# Altium PCB redox_rev1.PcbDoc
Units mm, origin at the board's own origin, x right, y up, seen from the top; angles counter-clockwise.
Board outline 162.18 x 126.49 mm, 2 copper layers (F.Cu, B.Cu); 86 components, 57 nets, 643 pads, 7 vias.
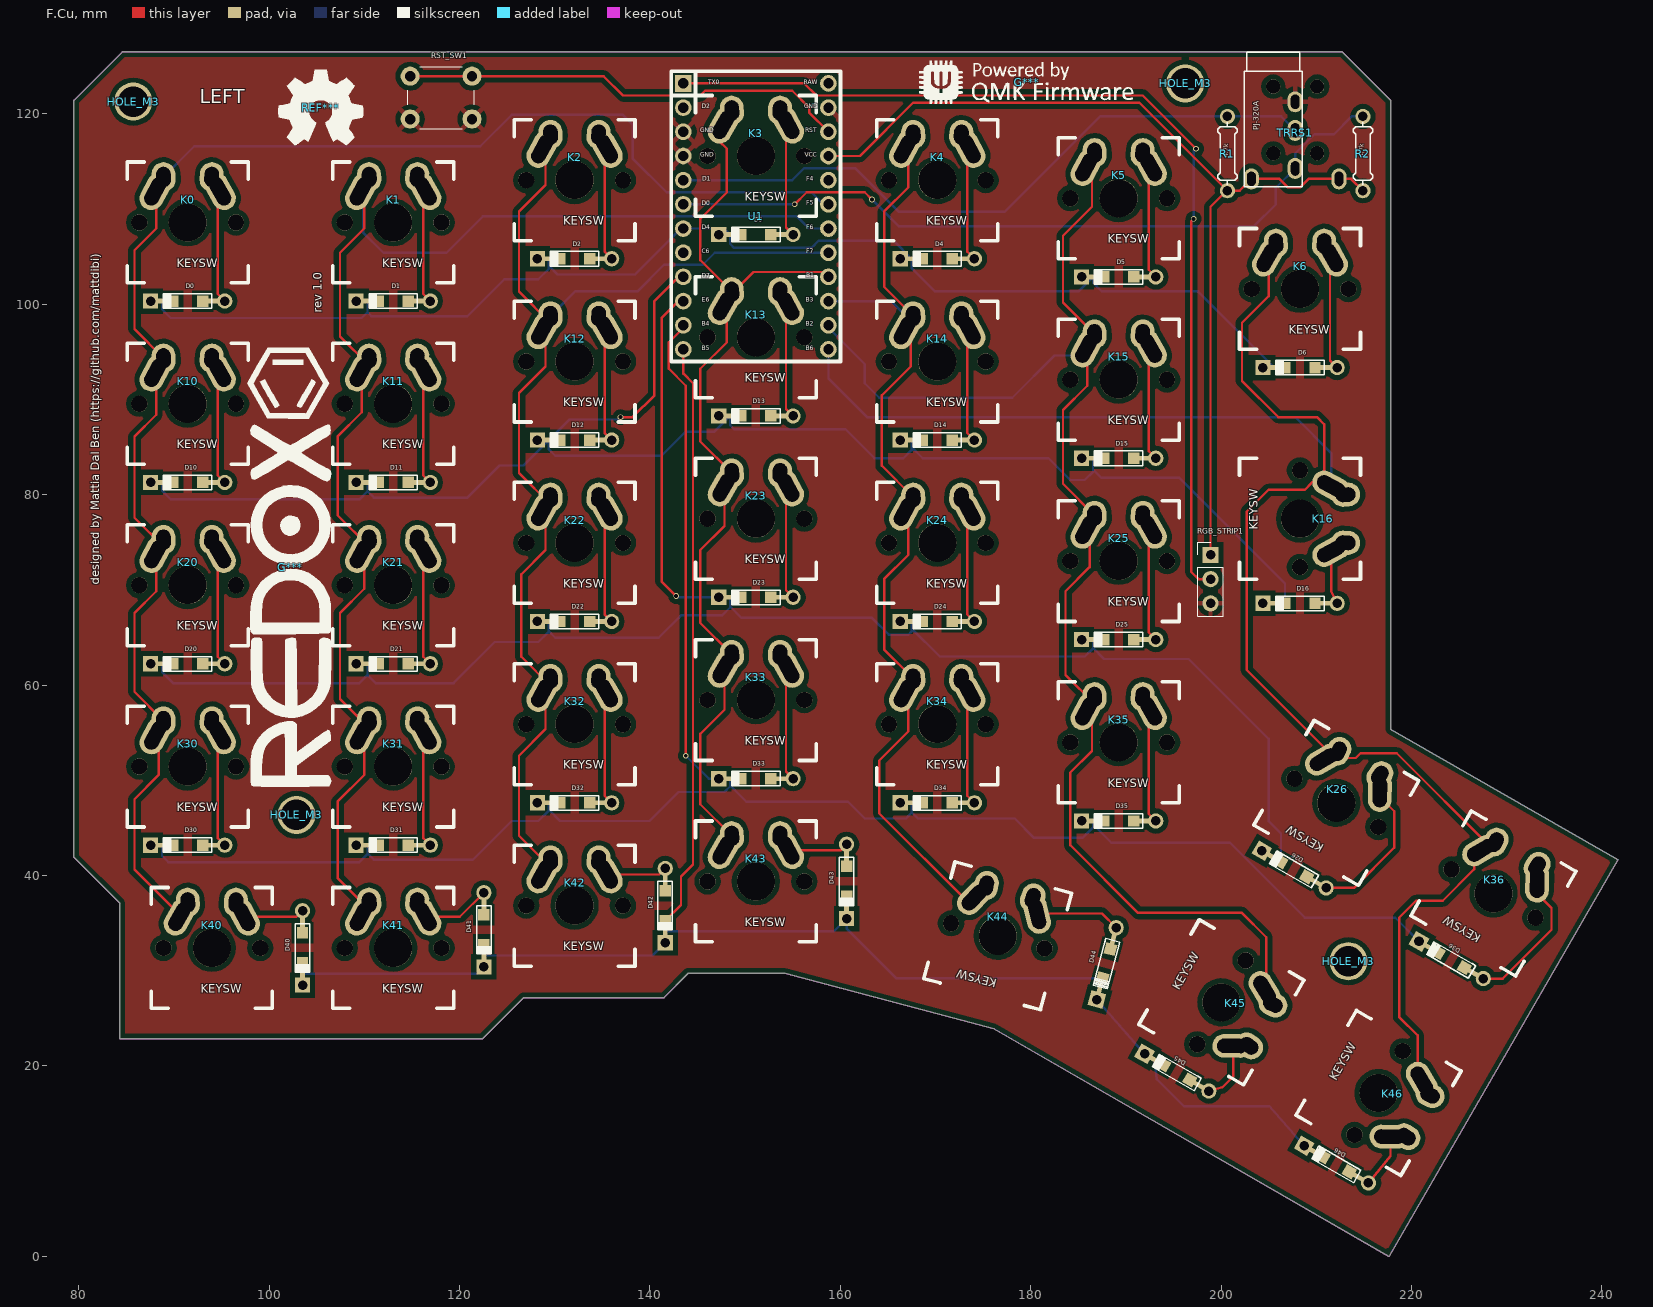
[diagram p0: F.Cu view]
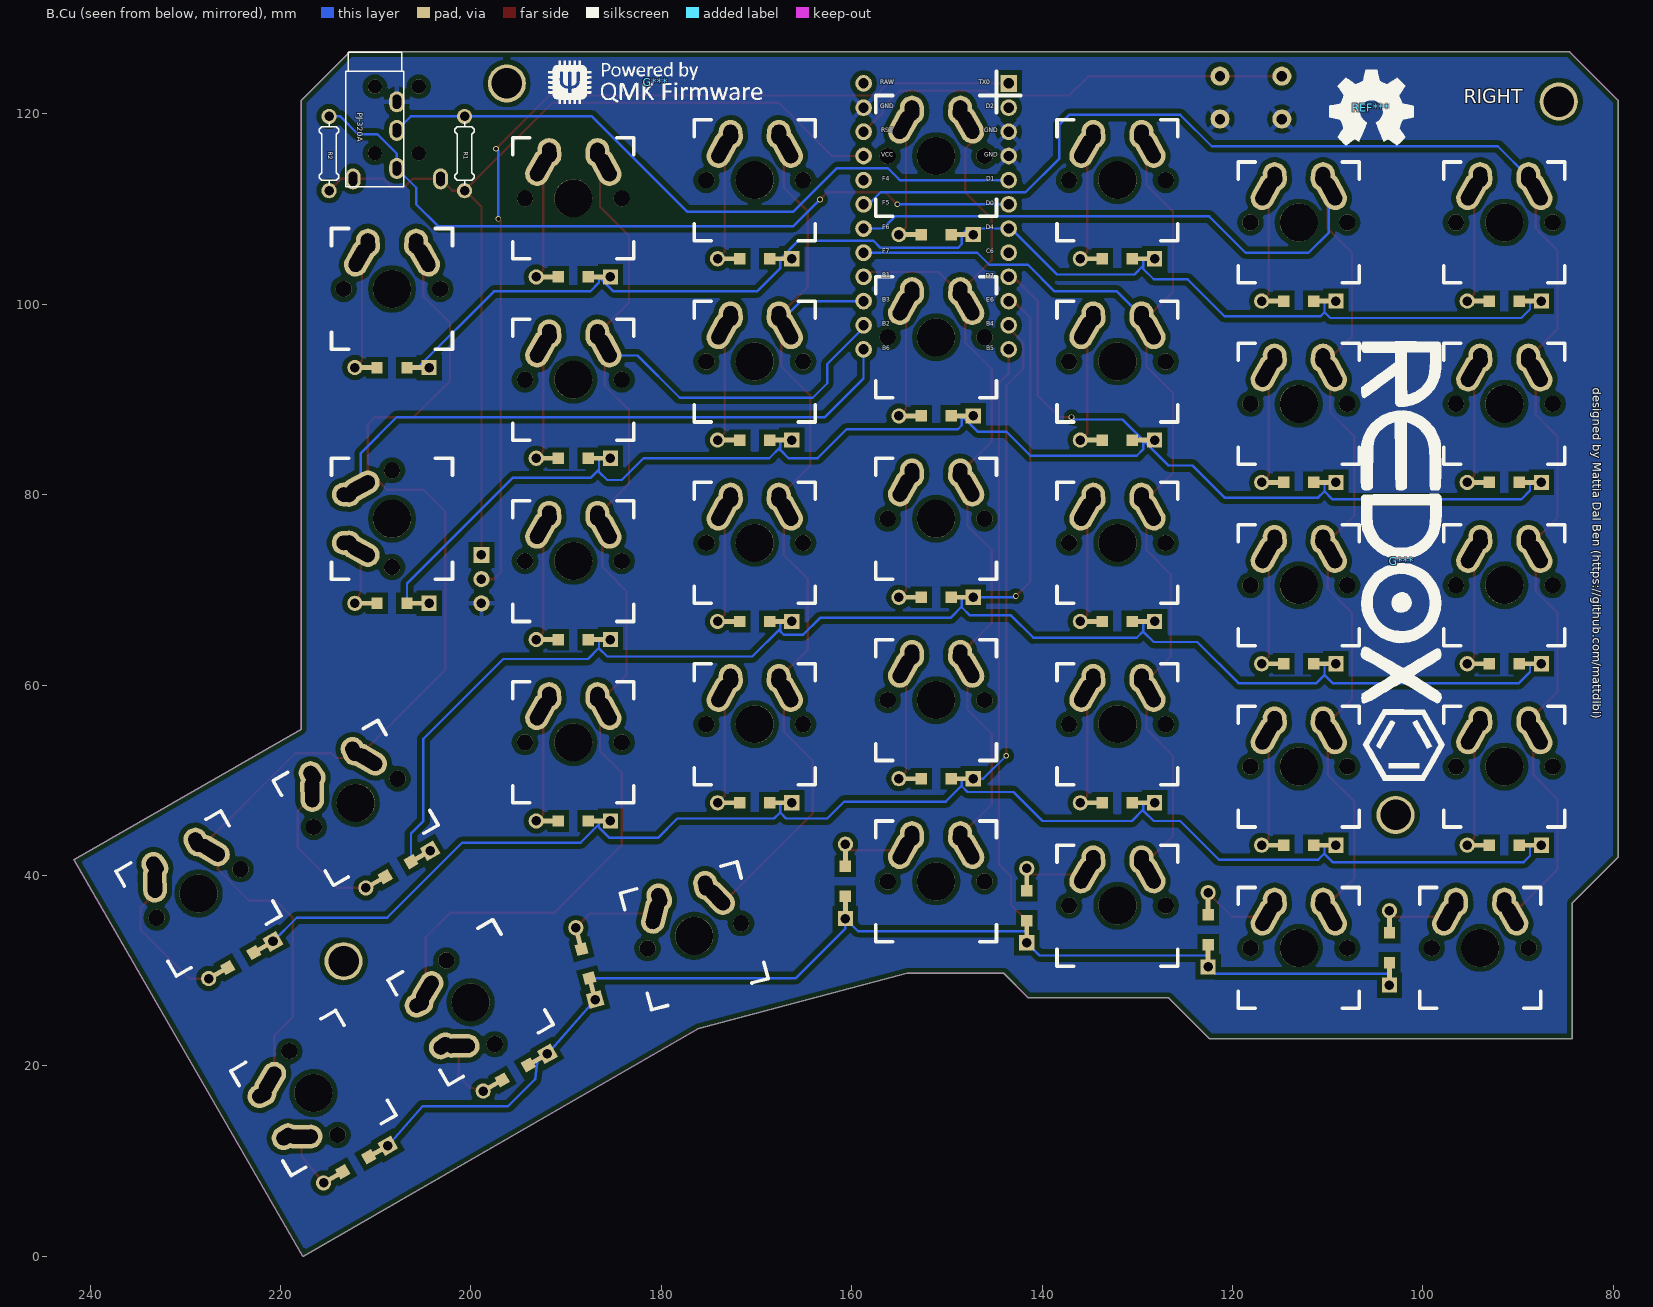
[diagram p1: B.Cu view, seen from below]

## Layer stack, top to bottom
F.Mask: solder mask 0.0102, Solder Resist, Dk 3.5
F.Cu: signal copper 0.0356
Dielectric 1: dielectric 0.32, FR-4, Dk 4.8
B.Cu: signal copper 0.0356
B.Mask: solder mask 0.0102, Solder Resist, Dk 3.5

## Board outline
79.502,118.11 79.502,121.412 84.582,126.492 212.725,126.492 217.805,121.412 217.805,111.252 217.805,55.372 241.681,41.656 217.678,0 217.551,0 176.149,23.876 154.178,29.718 144.018,29.718 141.478,27.178 126.746,27.178 122.428,22.86 84.328,22.86 84.328,37.084 79.502,41.91 79.502,118.11

## Design rules (kind name [scope] priority, off if disabled: settings)
Clearance "Clearence 0.508_Polygon" [InNamedPolygon('F.Cu-GND') OR InNamedPolygon('B.Cu-GND')] p1: gap=0.508 ignorepadtopadclearanceinfootprint=FALSE
Clearance "Clearence 0.2_NetClass" [InNetClass('Default')] p2: gap=0.2 ignorepadtopadclearanceinfootprint=FALSE
HoleSize "Hole Size (Default)" [All] p1: absolutevalues=TRUE maxlimit=10 minlimit=0.3 maxpercent=80.000 minpercent=20.000
MinimumSolderMaskSliver [All] p1: minsoldermaskwidth=0
PolygonConnect Polygon_B.Cu-GND_ConnectDirect [IsNamedPolygon('B.Cu-GND') vs IsVia] p1: connectstyle=Direct reliefconductorwidth=0.254 reliefentries=4 polygonreliefangle="90 Angle" airgapwidth=0.254
PolygonConnect Polygon_B.Cu-GND_ConnectRelief45 [IsNamedPolygon('B.Cu-GND') vs (IsThruPin or IsSMTPin) and (PadShape_AllLayers = 'Round')] p2: connectstyle=Relief reliefconductorwidth=0.508 reliefentries=4 polygonreliefangle="45 Angle" airgapwidth=0.508
PolygonConnect Polygon_B.Cu-GND_ConnectRelief90 [IsNamedPolygon('B.Cu-GND') vs (IsThruPin or IsSMTPin) and (PadShape_AllLayers <> 'Round')] p3: connectstyle=Relief reliefconductorwidth=0.508 reliefentries=4 polygonreliefangle="90 Angle" airgapwidth=0.508
PolygonConnect Polygon_F.Cu-GND_ConnectDirect [IsNamedPolygon('F.Cu-GND') vs IsVia] p4: connectstyle=Direct reliefconductorwidth=0.254 reliefentries=4 polygonreliefangle="90 Angle" airgapwidth=0.254
PolygonConnect Polygon_F.Cu-GND_ConnectRelief45 [IsNamedPolygon('F.Cu-GND') vs (IsThruPin or IsSMTPin) and (PadShape_AllLayers = 'Round')] p5: connectstyle=Relief reliefconductorwidth=0.508 reliefentries=4 polygonreliefangle="45 Angle" airgapwidth=0.508
PolygonConnect Polygon_F.Cu-GND_ConnectRelief90 [IsNamedPolygon('F.Cu-GND') vs (IsThruPin or IsSMTPin) and (PadShape_AllLayers <> 'Round')] p6: connectstyle=Relief reliefconductorwidth=0.508 reliefentries=4 polygonreliefangle="90 Angle" airgapwidth=0.508
RoutingVias [All] p1: holewidth=0.711 width=1.27 viastyle="Through Hole" minholewidth=0.711 minwidth=1.27 maxholewidth=0.711 maxwidth=1.27
SilkToSilkClearance [All] p1: silktosilkclearance=0
SilkToSolderMaskClearance [IsPad] p1: minsilkscreentomaskgap=0 clearancetoexposedcopper=TRUE
SolderMaskExpansion [All] p1: expansion=0.102 istentingtop=FALSE
Width [All] p1: maxlimit=10 minlimit=0.2 preferedwidth=0.25 minimp=50.000000 maximp=50.000000 favimp=50.000000
26 further rules are at their usual default settings.

## Classes and differential pairs
net class Default: col0 col1 col2 col3 col4 col5 col6 GND Net-(D0-Pad2) Net-(D1-Pad2) Net-(D2-Pad2) Net-(D3-Pad2) Net-(D4-Pad2) Net-(D5-Pad2) Net-(D6-Pad2) Net-(D10-Pad2) Net-(D11-Pad2) Net-(D12-Pad2) Net-(D13-Pad2) Net-(D14-Pad2) Net-(D15-Pad2) Net-(D16-Pad2) Net-(D20-Pad2) Net-(D21-Pad2) Net-(D22-Pad2) Net-(D23-Pad2) Net-(D24-Pad2) Net-(D25-Pad2) Net-(D26-Pad2) Net-(D30-Pad2) Net-(D31-Pad2) Net-(D32-Pad2) Net-(D33-Pad2) Net-(D34-Pad2) Net-(D35-Pad2) Net-(D36-Pad2) Net-(D40-Pad2) Net-(D41-Pad2) Net-(D42-Pad2) Net-(D43-Pad2) Net-(D44-Pad2) Net-(D45-Pad2) Net-(D46-Pad2) Net-(U1-Pad2) Net-(U1-Pad8) Net-(U1-Pad20) Net-(U1-Pad24) rgb_data row0 row1 row2 row3 row4 RST SCL SDA VCC

## Components (designator, comment, footprint, x,y, rotation, side; value= is the part's Value field where it differs from the comment)
D0 "D" Diode-dual 91.44,100.33 r180 top
D1 "D" Diode-dual 113.03,100.33 r180 top
D2 "D" Diode-dual 132.08,104.775 r180 top
D3 "D" Diode-dual 151.13,107.315 r180 top
D4 "D" Diode-dual 170.18,104.775 r180 top
D5 "D" Diode-dual 189.23,102.87 r180 top
D6 "D" Diode-dual 208.28,93.345 r180 top
D10 "D" Diode-dual 91.44,81.28 r180 top
D11 "D" Diode-dual 113.03,81.28 r180 top
D12 "D" Diode-dual 132.08,85.725 r180 top
D13 "D" Diode-dual 151.13,88.265 r180 top
D14 "D" Diode-dual 170.18,85.725 r180 top
D15 "D" Diode-dual 189.23,83.82 r180 top
D16 "D" Diode-dual 208.28,68.58 r180 top
D20 "D" Diode-dual 91.44,62.23 r180 top
D21 "D" Diode-dual 113.03,62.23 r180 top
D22 "D" Diode-dual 132.08,66.675 r180 top
D23 "D" Diode-dual 151.13,69.215 r180 top
D24 "D" Diode-dual 170.18,66.675 r180 top
D25 "D" Diode-dual 189.23,64.77 r180 top
D26 "D" Diode-dual 207.645,40.64 r150 top
D30 "D" Diode-dual 91.44,43.18 r180 top
D31 "D" Diode-dual 113.03,43.18 r180 top
D32 "D" Diode-dual 132.08,47.625 r180 top
D33 "D" Diode-dual 151.13,50.165 r180 top
D34 "D" Diode-dual 170.18,47.625 r180 top
D35 "D" Diode-dual 189.23,45.72 r180 top
D36 "D" Diode-dual 224.155,31.115 r150 top
D40 "D" Diode-dual 103.505,32.385 r270 top
D41 "D" Diode-dual 122.555,34.29 r270 top
D42 "D" Diode-dual 141.605,36.83 r270 top
D43 "D" Diode-dual 160.655,39.37 r270 top
D44 "D" Diode-dual 187.96,30.734 r255 top
D45 "D" Diode-dual 195.326,19.304 r150 top
D46 "D" Diode-dual 212.09,9.652 r150 top
G*** "LOGO" qmk-badge 180.594,123.317 r0 bottom
G*** "LOGO" qmk-badge 179.578,123.317 r0 top
G*** "LOGO" redox-logo 102.235,73.025 r90 bottom
G*** "LOGO" redox-logo 102.235,72.39 r90 top
HOLE_M3 "VAL**" HOLE_M3 196.215,123.19 r0 top
HOLE_M3 "VAL**" HOLE_M3 102.87,46.355 r0 top
HOLE_M3 "VAL**" HOLE_M3 85.725,121.285 r0 top
HOLE_M3 "VAL**" HOLE_M3 213.36,30.988 r0 top
K0 "KEYSW" Mx_Alps_125-dualside 91.44,108.585 r0 top
K1 "KEYSW" Mx_Alps_100-dualside 113.03,108.585 r0 top
K2 "KEYSW" Mx_Alps_100-dualside 132.08,113.03 r0 top
K3 "KEYSW" Mx_Alps_100-dualside 151.13,115.57 r0 top
K4 "KEYSW" Mx_Alps_100-dualside 170.18,113.03 r0 top
K5 "KEYSW" Mx_Alps_100-dualside 189.23,111.125 r0 top
K6 "KEYSW" Mx_Alps_100-dualside 208.28,101.6 r0 top
K10 "KEYSW" Mx_Alps_125-dualside 91.44,89.535 r0 top
K11 "KEYSW" Mx_Alps_100-dualside 113.03,89.535 r0 top
K12 "KEYSW" Mx_Alps_100-dualside 132.08,93.98 r0 top
K13 "KEYSW" Mx_Alps_100-dualside 151.13,96.52 r0 top
K14 "KEYSW" Mx_Alps_100-dualside 170.18,93.98 r0 top
K15 "KEYSW" Mx_Alps_100-dualside 189.23,92.075 r0 top
K16 "KEYSW" Mx_Alps_150-dualsided 208.28,77.47 r270 top
K20 "KEYSW" Mx_Alps_125-dualside 91.44,70.485 r0 top
K21 "KEYSW" Mx_Alps_100-dualside 113.03,70.485 r0 top
K22 "KEYSW" Mx_Alps_100-dualside 132.08,74.93 r0 top
K23 "KEYSW" Mx_Alps_100-dualside 151.13,77.47 r0 top
K24 "KEYSW" Mx_Alps_100-dualside 170.18,74.93 r0 top
K25 "KEYSW" Mx_Alps_100-dualside 189.23,73.025 r0 top
K26 "KEYSW" Mx_Alps_100-dualside 212.09,47.625 r330 top
K30 "KEYSW" Mx_Alps_125-dualside 91.44,51.435 r0 top
K31 "KEYSW" Mx_Alps_100-dualside 113.03,51.435 r0 top
K32 "KEYSW" Mx_Alps_100-dualside 132.08,55.88 r0 top
K33 "KEYSW" Mx_Alps_100-dualside 151.13,58.42 r0 top
K34 "KEYSW" Mx_Alps_100-dualside 170.18,55.88 r0 top
K35 "KEYSW" Mx_Alps_100-dualside 189.23,53.975 r0 top
K36 "KEYSW" Mx_Alps_100-dualside 228.6,38.1 r330 top
K40 "KEYSW" Mx_Alps_100-dualside 93.98,32.385 r0 top
K41 "KEYSW" Mx_Alps_100-dualside 113.03,32.385 r0 top
K42 "KEYSW" Mx_Alps_100-dualside 132.08,36.83 r0 top
K43 "KEYSW" Mx_Alps_100-dualside 151.13,39.37 r0 top
K44 "KEYSW" Mx_Alps_125-dualside 176.53,33.655 r345 top
K45 "KEYSW" Mx_Alps_150-dualsided 200.025,26.67 r240 top
K46 "KEYSW" Mx_Alps_150-dualsided 216.535,17.145 r240 top
R1 "4.7k" Resistor-Compact 200.66,115.824 r90 top
R2 "4.7k" Resistor-Compact 214.884,115.824 r90 top
REF*** "OSHW-Logo2_14.6x12mm_SilkScreen" OSHW-Symbol_8.9x8mm_SilkScreen 105.41,120.65 r0 bottom
REF*** "OSHW-Logo2_14.6x12mm_SilkScreen" OSHW-Symbol_8.9x8mm_SilkScreen 105.41,120.65 r0 top
RGB_STRIP1 "Conn_01x03" Pin_Header_Straight_1x03_Pitch2.54mm 198.882,73.66 r0 top
RST_SW1 "SW_PUSH" SW_PUSH_6mm_h4.3mm 114.808,123.952 r0 top
TRRS1 "Audio-Jack-4" TRRS-PJ-320A-dual 207.772,124.46 r0 top
U1 "ProMicro" ArduinoProMicro 151.13,109.22 r270 top

## Footprints (in the part's own frame and the unit in brackets; to place one, negate y for a bottom-side part, rotate by r counter-clockwise, add the part's x,y. Pads: shape width x height; smd on the part's side, far side on the other; paste and mask are expansions set on the pad)
ArduinoProMicro [mil]
  rect 69x69 hole 43 paste-69 mask+0: 1(-550,-300)
  round 69 hole 43 paste-69 mask+0: 2(-450,-300) 3(-350,-300) 4(-250,-300) 5(-150,-300) 6(-50,-300) 7(50,-300) 8(150,-300) 9(250,-300) 10(350,-300) 11(450,-300) 12(550,-300) 13(550,300) 14(450,300) 15(350,300) 16(250,300) 17(150,300) 18(50,300) 19(-50,300) 20(-150,300) 21(-250,300) 22(-350,300) 23(-450,300) 24(-550,300)
  silkscreen extent -600,-350 600,350
Diode-dual [mm]
  rect 1.2x1.2 smd far side mask+0: 1(1.575,0) 2(-1.575,0)
  rect 1.2x1.2 smd mask+0: 1(1.575,0) 2(-1.575,0)
  rect 2.5x0.5 smd far side paste-2.5 mask-2.5: 1(2.7,0) 2(-2.7,0)
  rect 2.5x0.5 smd paste-2.5 mask-2.5: 1(2.7,0) 2(-2.7,0)
  rect 1.6x1.6 hole 1 paste-1.6 mask+0: 1(3.9,0)
  round 1.6 hole 1 paste-1.6 mask+0: 2(-3.9,0)
  silkscreen extent -2.54,-0.76 2.54,0.76
HOLE_M3 [mm]
  round 4 hole 3.2 paste-4 mask+0: 1(0,0)
Mx_Alps_100-dualside [mm]
  rrect100% 2.5x4.17 hole 3.17 slot 1.5 at 150.95 deg rot 150.95 paste-4.17 mask+0: 1(-3.405,3.27)
  rrect100% 2.5x3.08 hole 2.08 slot 1.5 at 3.9 deg rot 3.9 paste-3.08 mask+0: 1(-2.52,4.79)
  rrect100% 2.5x3.08 hole 2.08 slot 1.5 at 176.1 deg rot 176.1 paste-3.08 mask+0: 2(2.52,4.79)
  rrect100% 2.5x4.17 hole 3.17 slot 1.5 at 29.05 deg rot 29.05 paste-4.17 mask+0: 2(3.405,3.27)
  round 1.702 hole 1.702 paste-1.702 mask-1.702: HOLE(-5.08,0) HOLE(5.08,0)
  round 3.988 hole 3.988 paste-3.988 mask-3.988: HOLE(0,0)
  silkscreen extent -6.35,-6.35 6.35,6.35
Mx_Alps_125-dualside [mm]
  rrect100% 2.5x4.17 hole 3.17 slot 1.5 at 150.95 deg rot 150.95 paste-4.17 mask+0: 1(-3.405,3.27)
  rrect100% 2.5x3.08 hole 2.08 slot 1.5 at 3.9 deg rot 3.9 paste-3.08 mask+0: 1(-2.52,4.79)
  rrect100% 2.5x3.08 hole 2.08 slot 1.5 at 176.1 deg rot 176.1 paste-3.08 mask+0: 2(2.52,4.79)
  rrect100% 2.5x4.17 hole 3.17 slot 1.5 at 29.05 deg rot 29.05 paste-4.17 mask+0: 2(3.405,3.27)
  round 1.702 hole 1.702 paste-1.702 mask-1.702: HOLE(-5.08,0) HOLE(5.08,0)
  round 3.988 hole 3.988 paste-3.988 mask-3.988: HOLE(0,0)
  silkscreen extent -6.35,-6.35 6.35,6.35
Mx_Alps_150-dualsided [mm]
  rrect100% 2.5x4.17 hole 3.17 slot 1.5 at 150.95 deg rot 150.95 paste-4.17 mask+0: 1(-3.405,3.27)
  rrect100% 2.5x3.08 hole 2.08 slot 1.5 at 3.9 deg rot 3.9 paste-3.08 mask+0: 1(-2.52,4.79)
  rrect100% 2.5x3.08 hole 2.08 slot 1.5 at 176.1 deg rot 176.1 paste-3.08 mask+0: 2(2.52,4.79)
  rrect100% 2.5x4.17 hole 3.17 slot 1.5 at 29.05 deg rot 29.05 paste-4.17 mask+0: 2(3.405,3.27)
  round 1.702 hole 1.702 paste-1.702 mask-1.702: HOLE(-5.08,0) HOLE(5.08,0)
  round 3.988 hole 3.988 paste-3.988 mask-3.988: HOLE(0,0)
  silkscreen extent -6.35,-6.35 6.35,6.35
OSHW-Symbol_8.9x8mm_SilkScreen [mm]
  silkscreen extent -4.46,-4 4.44,3.96
Pin_Header_Straight_1x03_Pitch2.54mm [mm]
  rect 1.7x1.7 hole 1 paste-1.7 mask+0: 1(0,0)
  rrect100% 1.7x1.7 hole 1 paste-1.7 mask+0: 2(0,-2.54) 3(0,-5.08)
  silkscreen extent -1.33,-6.41 1.33,1.33
qmk-badge [mm]
  silkscreen extent -11.19,-2.26 11.29,2.29
redox-logo [mm]
  silkscreen extent -23.06,-4.55 23.06,4.27
Resistor-Compact [mm]
  round 1.6 hole 1 paste-1.6 mask+0: 1(3.9,0) 2(-3.9,0)
  silkscreen extent -3.3,-1.02 3.3,1.02
SW_PUSH_6mm_h4.3mm [mm]
  round 2 hole 1.1 paste-2 mask+0: 1(0,0) 1(6.5,0) 2(0,-4.5) 2(6.5,-4.5)
  silkscreen extent -0.25,-5.5 6.75,1
TRRS-PJ-320A-dual [mm]
  rrect100% 1.6x2.2 hole 1.5 slot 0.9 at 0 deg paste-2.2 mask+0: 1(-4.6,-11.3) 1(4.6,-11.3) 2(0,-10.2) 3(0,-6.2) 4(0,-3.2)
  round 1.5 hole 1.5 paste-1.5 mask+0: Un1(2.3,-8.6) Un2(2.3,-1.6) Un3(-2.3,-8.6) Un4(-2.3,-1.6)
  silkscreen extent -5.35,-12.1 0.75,2

## Part data
D0 D1 D2 D3 D4 D5 D6 D10 D11 D12 D13 D14 D15 D16 D20 D21 D22 D23 D24 D25 D26 D30 D31 D32 D33 D34 D35 D36 D40 D41 D42 D43 D44 D45 D46: library part Diode-dual
G*** G***: library part qmk-badge
G*** G***: library part redox-logo
HOLE_M3 HOLE_M3 HOLE_M3 HOLE_M3: library part HOLE_M3
K0 K10 K20 K30 K44: library part Mx_Alps_125-dualside, "MXALPS"
K1 K2 K3 K4 K5 K6 K11 K12 K13 K14 K15 K21 K22 K23 K24 K25 K26 K31 K32 K33 K34 K35 K36 K40 K41 K42 K43: library part Mx_Alps_100-dualside, "MXALPS"
K16 K45 K46: library part Mx_Alps_150-dualsided, "MXALPS"
R1 R2: library part Resistor-Compact
REF*** REF***: library part OSHW-Symbol_8.9x8mm_SilkScreen, "Open Source Hardware Symbol"
RGB_STRIP1: library part Pin_Header_Straight_1x03_Pitch2.54mm, "Through hole straight pin header, 1x03, 2.54mm pitch, single row"
RST_SW1: library part SW_PUSH_6mm_h4.3mm, "tactile push button, 6x6mm e.g. PHAP33xx series, height=4.3mm"
TRRS1: library part TRRS-PJ-320A-dual
U1: library part ArduinoProMicro

## Via types
v1: diameter 0.6, hole 0.4, F.Cu to B.Cu, tented both sides, 7 vias

## Nets (pads, with @x,y where several pads share a name; then routed paths per layer and width w, separated by ;. In a path a pad name is that pad's centre, name@x,y a point inside that pad or via, vN(x,y) a via of type N, cw(c..) or ccw(c..) an arc to the next point about the centre after c; other vN are vias at no path point)
col0: K0.1 K10.1 K20.1 K30.1 K40.1 U1.19 | length 167.6
  F.Cu w0.25: K0.1@88.94,112.585 88.94,112.51 88.138,111.708 88.138,107.95 85.852,105.664 85.852,97.393 88.92,94.325 88.94,93.535 88.94,93.46 88.138,92.658 88.138,88.392 85.852,86.106 85.852,77.573 88.94,74.485 88.94,74.41 88.138,73.608 88.138,69.85 85.852,67.564 85.852,59.293 88.92,56.225 88.94,55.435 88.94,55.36 88.392,54.812 88.392,50.546 85.852,48.006 85.852,40.628 90.095,36.385 K40.1@91.48,36.385
  B.Cu w0.25: K0.1@88.94,112.585 88.92,113.375 92.131,116.586 122.174,116.586 125.476,119.888 137.16,119.888 138.176,118.872 138.176,115.316 141.732,111.76 156.972,111.76 158.242,110.49 U1.19
col1: K1.1 K11.1 K21.1 K31.1 K41.1 U1.18 | length 144
  F.Cu w0.25: K41.1@110.53,36.385 107.188,39.727 107.188,47.752 109.982,50.546 109.982,54.812 110.53,55.36 110.53,55.435 107.442,58.523 107.442,67.564 109.982,70.104 109.982,73.862 110.53,74.41 110.53,74.485 107.188,77.827 107.188,86.106 109.728,88.646 109.728,92.658 110.53,93.46 110.53,93.535 107.442,96.623 107.442,105.41 109.982,107.95 109.982,111.962 110.53,112.51 K1.1@110.53,112.585
  B.Cu w0.25: K1.1@110.53,112.585 109.875,111.855 109.875,107.549 112.014,105.41 118.618,105.41 122.428,109.22 155.448,109.22 156.718,107.95 U1.18
col2: K2.1 K12.1 K22.1 K32.1 K42.1 U1.17 | length 119.8
  F.Cu w0.25: K42.1@129.58,40.83 126.238,44.172 126.238,52.578 129.032,55.372 129.032,59.257 129.58,59.805 129.58,59.88 126.492,62.968 126.492,71.628 129.032,74.168 129.032,78.307 129.58,78.855 129.58,78.93 126.238,82.272 126.238,90.678 129.032,93.472 129.032,97.357 129.58,97.905 129.58,97.98 126.238,101.322 126.238,109.728 129.032,112.522 129.032,116.407 129.58,116.955 K2.1@129.58,117.03
  B.Cu w0.25: K12.1@129.58,97.98 129.56,98.77 132.136,101.346 138.684,101.346 141.478,104.14 145.542,104.14 146.812,105.41 U1.17
col3: K3.1 K13.1 K23.1 K33.1 K43.1 U1.16 | length 97.1
  F.Cu w0.25: K3.1@147.32,118.11 147.32,117.094 148.082,116.332 148.082,111.76 145.288,108.966 145.288,104.632 148.61,101.31 148.63,101.29 K13.1@148.63,101.132 ; K43.1@148.63,43.37 148.61,44.16 145.288,47.482 145.288,54.864 147.828,57.404 147.828,61.543 148.63,62.345 148.63,62.42 148.61,63.21 145.288,66.532 145.288,74.168 147.828,76.708 147.828,80.593 148.63,81.395 148.63,81.47 148.61,82.26 145.288,85.582 145.288,93.218 148.082,96.012 148.082,99.897 148.63,100.445 148.63,100.52 K13.1@148.63,101.132 ; U1.16 158.242,103.378 150.876,103.378 K13.1@148.63,101.132
col4: K4.1 K14.1 K24.1 K34.1 K44.1 U1.15 | length 103.1
  F.Cu w0.25: K4.1@167.68,117.03 167.68,116.955 167.132,116.407 167.132,112.268 164.592,109.728 164.592,101.838 167.66,98.77 167.68,97.98 167.68,97.905 167.386,97.611 167.386,93.472 164.338,90.424 164.338,83.042 167.66,79.72 167.68,78.93 167.68,78.855 167.132,78.307 167.132,73.66 164.592,71.12 164.592,63.738 167.66,60.67 167.68,59.88 167.68,59.805 167.132,59.257 167.132,55.118 164.084,52.07 164.084,46.518 173.497,37.105 K44.1@173.507,37.095
  B.Cu w0.25: U1.15 165.33,100.33 K14.1@167.68,97.98
col5: K5.1 K15.1 K25.1 K35.1 K45.1 U1.14 | length 145.7
  F.Cu w0.25: K35.1@186.182,57.352 K35.1@186.436,57.606 ; K5.1@186.73,115.125 186.73,115.05 186.436,114.756 186.436,110.236 183.388,107.188 183.388,100.187 186.71,96.865 186.73,96.075 186.73,96 185.928,95.198 185.928,91.44 183.388,88.9 183.388,81.137 186.71,77.815 186.73,77.025 186.73,76.95 186.182,76.402 186.182,72.39 183.642,69.85 183.642,61.063 186.73,57.975 186.73,57.9 K35.1@186.436,57.606 ; K45.1@204.739,26.835 204.739,33.513 202.184,36.068 191.262,36.068 184.15,43.18 184.15,50.8 186.436,53.086 K35.1@186.436,57.606
  B.Cu w0.25: U1.14 158.75,97.536 162.56,93.726 162.56,91.694 164.084,90.17 178.054,90.17 182.499,94.615 K15.1@185.42,94.615
col6: K6.1 K16.1 K26.1 K36.1 K46.1 U1.13 | length 184.3
  F.Cu w0.25: K6.1@205.78,105.6 205.78,105.525 204.978,104.723 204.978,100.838 202.184,98.044 202.184,91.948 205.994,88.138 210.058,88.138 210.82,87.376 210.82,81.28 209.55,81.28 208.788,80.518 204.978,80.518 202.692,78.232 202.692,61.572 211.925,52.339 214.137,52.339 214.63,52.832 218.44,52.832 228.435,42.837 K36.1@228.435,42.814 ; K46.1@220.64,19.175 220.64,23.2 218.694,25.146 218.694,35.56 220.472,37.338 223.266,37.338 226.57,40.642 K36.1@226.57,42.205
  B.Cu w0.25: U1.13 158.75,92.202 162.814,88.138 207.772,88.138 211.55,84.36 211.55,80.875 211.55,80.625 K16.1@212.28,79.97
GND: RGB_STRIP1.3 RST_SW1.2 TRRS1.4 U1.3 U1.4 U1.23
Net-(D0-Pad2): D0.2 K0.2 | length 11.8
  F.Cu w0.25: K0.2@94.595,111.855 94.595,101.075 D0.2@95.34,100.33
Net-(D1-Pad2): D1.2 K1.2 | length 11.8
  F.Cu w0.25: K1.2@116.185,111.855 116.185,101.075 D1.2@116.93,100.33
Net-(D2-Pad2): D2.2 K2.2 | length 11.8
  F.Cu w0.25: K2.2@135.235,116.3 135.235,105.52 D2.2@135.98,104.775
Net-(D3-Pad2): D3.2 K3.2 | length 11.8
  F.Cu w0.25: K3.2@154.285,118.84 154.285,108.06 D3.2@155.03,107.315
Net-(D4-Pad2): D4.2 K4.2 | length 11.8
  F.Cu w0.25: K4.2@173.335,116.3 173.335,105.52 D4.2@174.08,104.775
Net-(D5-Pad2): D5.2 K5.2 | length 11.8
  F.Cu w0.25: K5.2@192.385,114.395 192.385,103.615 D5.2@193.13,102.87
Net-(D6-Pad2): D6.2 K6.2 | length 11.8
  F.Cu w0.25: K6.2@211.435,104.87 211.435,94.09 D6.2@212.18,93.345
Net-(D10-Pad2): D10.2 K10.2 | length 11.8
  F.Cu w0.25: K10.2@94.595,92.805 94.595,82.025 D10.2@95.34,81.28
Net-(D11-Pad2): D11.2 K11.2 | length 11.8
  F.Cu w0.25: K11.2@116.185,92.805 116.185,82.025 D11.2@116.93,81.28
Net-(D12-Pad2): D12.2 K12.2 | length 11.8
  F.Cu w0.25: K12.2@135.235,97.25 135.235,86.47 D12.2@135.98,85.725
Net-(D13-Pad2): D13.2 K13.2 | length 11.8
  F.Cu w0.25: K13.2@154.285,99.79 154.285,89.01 D13.2@155.03,88.265
Net-(D14-Pad2): D14.2 K14.2 | length 11.8
  F.Cu w0.25: K14.2@173.335,97.25 173.335,86.47 D14.2@174.08,85.725
Net-(D15-Pad2): D15.2 K15.2 | length 11.8
  F.Cu w0.25: K15.2@192.385,95.345 192.385,84.565 D15.2@193.13,83.82
Net-(D16-Pad2): D16.2 K16.2 | length 5.9
  F.Cu w0.25: K16.2@211.55,74.315 211.55,74.065 211.55,69.845 211.942,69.059 D16.2@212.18,68.58
Net-(D20-Pad2): D20.2 K20.2 | length 11.8
  F.Cu w0.25: K20.2@94.595,73.755 94.595,62.975 D20.2@95.34,62.23
Net-(D21-Pad2): D21.2 K21.2 | length 11.8
  F.Cu w0.25: K21.2@116.185,73.755 116.185,62.975 D21.2@116.93,62.23
Net-(D22-Pad2): D22.2 K22.2 | length 11.8
  F.Cu w0.25: K22.2@135.235,78.2 135.235,67.42 D22.2@135.98,66.675
Net-(D23-Pad2): D23.2 K23.2 | length 11.8
  F.Cu w0.25: K23.2@154.285,80.74 154.285,69.96 D23.2@155.03,69.215
Net-(D24-Pad2): D24.2 K24.2 | length 11.8
  F.Cu w0.25: K24.2@173.335,78.2 173.335,67.42 D24.2@174.08,66.675
Net-(D25-Pad2): D25.2 K25.2 | length 11.8
  F.Cu w0.25: K25.2@192.385,76.295 192.385,65.515 D25.2@193.13,64.77
Net-(D26-Pad2): D26.2 K26.2 | length 15.6
  F.Cu w0.25: D26.2@211.022,38.69 213.95,38.69 218.186,42.926 218.186,46.736 216.457,48.465 K26.2@216.457,48.879
Net-(D30-Pad2): D30.2 K30.2 | length 11.8
  F.Cu w0.25: K30.2@94.595,54.705 94.595,43.925 D30.2@95.34,43.18
Net-(D31-Pad2): D31.2 K31.2 | length 11.8
  F.Cu w0.25: K31.2@116.185,54.705 116.185,43.925 D31.2@116.93,43.18
Net-(D32-Pad2): D32.2 K32.2 | length 11.8
  F.Cu w0.25: K32.2@135.235,59.15 135.235,48.37 D32.2@135.98,47.625
Net-(D33-Pad2): D33.2 K33.2 | length 11.8
  F.Cu w0.25: K33.2@154.285,61.69 154.285,50.91 D33.2@155.03,50.165
Net-(D34-Pad2): D34.2 K34.2 | length 11.8
  F.Cu w0.25: K34.2@173.335,59.15 173.335,48.37 D34.2@174.08,47.625
Net-(D35-Pad2): D35.2 K35.2 | length 11.8
  F.Cu w0.25: K35.2@192.385,57.245 192.385,46.465 D35.2@193.13,45.72
Net-(D36-Pad2): D36.2 K36.2 | length 15.1
  F.Cu w0.25: D36.2@227.532,29.165 229.571,29.165 234.696,34.29 234.696,36.576 232.967,38.305 K36.2@232.967,39.354
Net-(D40-Pad2): D40.2 K40.2 | length 6.6
  F.Cu w0.25: K40.2@97.135,35.655 97.385,35.655 102.875,35.655 D40.2@103.505,36.285
Net-(D41-Pad2): D41.2 K41.2 | length 7.4
  F.Cu w0.25: K41.2@116.185,35.655 116.435,35.655 120.02,35.655 D41.2@122.555,38.19
Net-(D42-Pad2): D42.2 K42.2 | length 6.6
  F.Cu w0.25: K42.2@135.235,40.1 135.485,40.1 140.975,40.1 D42.2@141.605,40.73
Net-(D43-Pad2): D43.2 K43.2 | length 6.6
  F.Cu w0.25: K43.2@154.285,42.64 154.535,42.64 160.025,42.64 D43.2@160.655,43.27
Net-(D44-Pad2): D44.2 K44.2 | length 9.2
  F.Cu w0.25: K44.2@180.424,35.984 180.424,35.997 187.474,35.997 D44.2@188.969,34.501
Net-(D45-Pad2): D45.2 K45.2 | length 6.5
  F.Cu w0.25: D45.2@198.703,17.354 200.107,17.735 201.279,18.907 K45.2@201.279,22.303
Net-(D46-Pad2): D46.2 K46.2 | length 5.9
  F.Cu w0.25: D46.2@215.467,7.702 217.789,10.532 K46.2@217.789,12.778
Net-(U1-Pad2): U1.2
Net-(U1-Pad8): U1.8
Net-(U1-Pad20): U1.20
Net-(U1-Pad24): U1.24
rgb_data: RGB_STRIP1.2 U1.1 | length 103.7
  F.Cu w0.25: U1.1 156.21,123.19 157.48,121.92 191.77,121.92 v1(197.358,116.332) ; v1(197.104,108.966) 196.85,108.712 196.85,71.882 197.612,71.12 RGB_STRIP1.2
  B.Cu w0.25: v1(197.104,108.966) 197.104,116.078 v1(197.358,116.332)
row0: D0.1 D1.1 D2.1 D3.1 D4.1 D5.1 D6.1 U1.7 | length 134.6
  B.Cu w0.25: D0.1@88.74,100.33 88.74,99.474 89.662,98.552 109.728,98.552 110.33,99.154 ; D1.1@110.33,100.33 110.33,99.154 ; D2.1@129.38,104.775 129.38,104.046 ; D6.1@205.58,93.345 197.579,101.346 187.452,101.346 186.53,102.268 186.53,102.87 185.006,101.346 169.926,101.346 167.48,103.792 167.48,104.775 165.575,106.68 157.734,106.68 156.972,105.918 148.844,105.918 148.43,106.332 148.43,107.315 147.795,107.95 U1.7 143.256,107.95 138.43,103.124 130.302,103.124 129.38,104.046 ; 110.33,99.154 110.744,98.74 120.838,98.74 124.714,102.616 128.27,102.616 129.38,103.726 129.38,104.046
row1: D10.1 D11.1 D12.1 D13.1 D14.1 D15.1 D16.1 U1.9 | length 167.4
  F.Cu w0.25: v1(136.906,88.138) 138.176,88.138 140.462,90.424 140.462,100.33 143.002,102.87 U1.9
  B.Cu w0.25: D10.1@88.74,81.28 88.74,80.424 89.662,79.502 109.474,79.502 110.33,80.358 ; D11.1@110.33,81.28 110.33,80.358 ; v1(136.906,88.138) 136.652,87.884 131.539,87.884 D12.1@129.38,85.725 ; D14.1@167.48,85.725 167.48,84.996 ; D15.1@186.53,83.82 186.53,82.644 ; D16.1@206.705,68.58 206.705,70.663 195.58,81.788 187.386,81.788 186.53,82.644 ; 110.33,80.358 110.998,79.69 120.838,79.69 124.206,83.058 126.713,83.058 D12.1@129.38,85.725 ; D12.1@129.38,85.725 129.38,84.742 130.048,84.074 141.224,84.074 143.764,86.614 146.779,86.614 148.43,88.265 148.43,87.282 148.844,86.868 160.528,86.868 163.576,83.82 166.624,83.82 167.48,84.676 167.48,84.996 ; 167.48,84.996 168.656,83.82 181.864,83.82 184.15,81.534 185.674,81.534 186.53,82.39 186.53,82.644
row2: D20.1 D21.1 D22.1 D23.1 D24.1 D25.1 D26.1 U1.10 | length 186.4
  F.Cu w0.25: v1(142.748,69.342) 141.224,70.866 141.224,98.552 143.002,100.33 U1.10
  B.Cu w0.25: D20.1@88.74,62.23 88.74,61.374 89.916,60.198 109.474,60.198 110.33,61.054 ; D21.1@110.33,62.23 110.33,61.054 ; D22.1@129.38,66.675 129.38,65.626 ; v1(142.748,69.342) 142.875,69.215 147.23,69.215 148.43,69.215 148.43,68.232 ; D24.1@167.48,66.675 167.48,65.946 ; D25.1@186.53,64.77 186.53,63.914 ; D26.1@206.281,41.427 206.281,44.417 204.978,45.72 204.978,54.356 196.596,62.738 187.706,62.738 186.53,63.914 ; 110.33,61.054 111.186,60.198 119.38,60.198 123.698,64.516 128.27,64.516 129.38,65.626 ; 129.38,65.626 130.048,64.958 140.904,64.958 143.256,67.31 147.574,67.31 148.43,68.166 148.43,68.232 ; 148.43,68.232 149.606,67.056 163.322,67.056 165.1,65.278 167.132,65.278 167.48,65.626 167.48,65.946 ; 167.48,65.946 170.434,62.992 185.674,62.992 186.53,63.848 186.53,63.914
row3: D30.1 D31.1 D32.1 D33.1 D34.1 D35.1 D36.1 U1.11 | length 204.2
  F.Cu w0.25: U1.11 143.51,97.536 141.986,96.012 141.986,93.218 143.764,91.44 v1(143.764,52.578)
  B.Cu w0.25: D30.1@88.74,43.18 88.74,42.07 89.408,41.402 109.474,41.402 110.33,42.258 110.33,42.324 ; D31.1@110.33,43.18 110.33,42.324 ; D32.1@129.38,47.625 129.38,46.896 ; v1(143.764,52.578) 146.177,50.165 147.23,50.165 148.43,50.165 148.43,49.436 ; D34.1@167.48,47.625 167.48,46.642 ; D35.1@186.53,45.72 186.53,45.372 ; D36.1@221.817,32.465 220.778,33.065 218.283,35.56 208.788,35.56 200.914,43.434 188.468,43.434 186.53,45.372 ; 110.33,42.324 110.998,41.656 121.412,41.656 125.476,45.72 128.27,45.72 129.38,46.83 129.38,46.896 ; 129.38,46.896 130.556,45.72 139.954,45.72 143.002,48.768 147.828,48.768 148.43,49.37 148.43,49.436 ; 148.43,49.436 150.114,47.752 160.782,47.752 162.56,45.974 166.878,45.974 167.48,46.576 167.48,46.642 ; 167.48,46.642 168.148,45.974 178.308,45.974 180.34,43.942 185.42,43.942 186.53,45.052 186.53,45.372
row4: D40.1 D41.1 D42.1 D43.1 D44.1 D45.1 D46.1 U1.12 | length 186.9
  F.Cu w0.25: D42.1@141.605,35.255 143.256,36.906 143.256,39.878 144.526,41.148 144.526,91.694 143.51,92.71 U1.12
  B.Cu w0.25: D40.1@103.505,29.685 121.85,29.685 122.555,30.39 122.555,31.59 140.265,31.59 141.605,32.93 141.605,34.13 159.315,34.13 D43.1@160.655,35.47 ; D43.1@160.655,36.67 D43.1@160.655,35.47 ; D44.1@186.951,26.967 D44.1@187.261,28.126 ; D44.1@187.139,28.126 D44.1@187.261,28.126 ; D44.1@187.552,29.213 165.859,29.213 160.655,34.417 D43.1@160.655,35.47 ; D46.1@209.752,11.002 208.713,11.602 205.075,15.748 196.088,15.748 193.242,18.594 193.071,19.982 192.988,20.654 191.949,21.254 187.261,26.576 D44.1@187.261,28.126
RST: RST_SW1.1 U1.22 | length 47.1
  F.Cu w0.25: RST_SW1.1@114.808,123.952 121.308,123.952 135.128,123.952 137.16,121.92 145.288,121.92 145.796,122.428 154.94,122.428 156.718,120.65 156.718,120.142 U1.22
SCL: R2.1 TRRS1.2 U1.6 | length 80.1
  F.Cu w0.25: v1(155.194,110.49) 156.464,111.76 162.56,111.76 v1(163.322,110.998)
  B.Cu w0.25: U1.6 v1(155.194,110.49) ; v1(163.322,110.998) 166.116,108.204 203.454,108.204 205.74,110.49 205.74,112.228 TRRS1.2 207.772,115.824 209.804,117.856 211.836,117.856 213.704,119.724 R2.1
SDA: R1.1 TRRS1.3 U1.5 | length 71.4
  B.Cu w0.25: U1.5 154.94,113.03 156.21,114.3 161.544,114.3 166.116,109.728 177.292,109.728 187.288,119.724 R1.1 206.308,119.724 TRRS1.3
VCC: R1.2 R2.2 RGB_STRIP1.1 TRRS1.1 U1.21 | length 103.1
  F.Cu w0.25: U1.21 162.052,115.57 167.64,121.158 191.426,121.158 R1.2 ; RGB_STRIP1.1 198.882,110.236 200.57,111.924 R1.2 ; R2.2 213.648,113.16 212.372,113.16 209.172,113.16 208.28,112.268 207.01,112.268 206.118,113.16 203.172,113.16 201.936,111.924 R1.2
pads on no net: HOLE_M3.1 K0.HOLE K1.HOLE K2.HOLE K3.HOLE K4.HOLE K5.HOLE K6.HOLE K10.HOLE K11.HOLE K12.HOLE K13.HOLE K14.HOLE K15.HOLE K16.HOLE K20.HOLE K21.HOLE K22.HOLE K23.HOLE K24.HOLE K25.HOLE K26.HOLE K30.HOLE K31.HOLE K32.HOLE K33.HOLE K34.HOLE K35.HOLE K36.HOLE K40.HOLE K41.HOLE K42.HOLE K43.HOLE K44.HOLE K45.HOLE K46.HOLE TRRS1.Un1 TRRS1.Un2 TRRS1.Un3 TRRS1.Un4

## Polygon pours and split planes (outlines as drawn)
GND on F.Cu "F.Cu-GND" (solid, remove dead copper, pour order 0): 217.805,121.412 217.805,55.372 241.681,41.656 217.678,0 217.551,0 176.149,23.876 154.178,29.718 144.018,29.718 141.478,27.178 126.746,27.178 122.428,22.86 84.328,22.86 84.328,37.084 79.502,41.91 79.502,121.412 84.582,126.492 212.725,126.492
GND on B.Cu "B.Cu-GND" (solid, remove dead copper, pour order 1): 217.805,121.412 217.805,55.372 241.681,41.656 217.678,0 217.551,0 176.149,23.876 154.178,29.718 144.018,29.718 141.478,27.178 126.746,27.178 122.428,22.86 84.328,22.86 84.328,37.084 79.502,41.91 79.502,121.412 84.582,126.492 212.725,126.492

## Keep-outs
Edge.Cuts:
  lines w0.1: 79.502,41.91 79.502,118.11 ; 79.502,41.91 84.328,37.084 ; 79.502,41.91 79.502,118.11 ; 79.502,41.91 84.328,37.084 ; 79.502,118.11 79.502,121.412 ; 79.502,118.11 79.502,121.412 ; 79.502,121.412 84.582,126.492 ; 79.502,121.412 84.582,126.492 ; 84.328,22.86 84.328,37.084 ; 84.328,22.86 122.428,22.86 ; 84.328,22.86 84.328,37.084 ; 84.328,22.86 122.428,22.86 ; 84.582,126.492 212.725,126.492 ; 84.582,126.492 212.725,126.492 ; 122.428,22.86 126.746,27.178 ; 122.428,22.86 126.746,27.178 ; 126.746,27.178 141.478,27.178 ; 126.746,27.178 141.478,27.178 ; 141.478,27.178 144.018,29.718 ; 141.478,27.178 144.018,29.718 ; 144.018,29.718 154.178,29.718 ; 144.018,29.718 154.178,29.718 ; 154.178,29.718 176.149,23.876 ; 154.178,29.718 176.149,23.876 ; 176.149,23.876 217.551,0 ; 176.149,23.876 217.551,0 ; 212.725,126.492 217.805,121.412 ; 212.725,126.492 217.805,121.412 ; 217.551,0 217.678,0 ; 217.551,0 217.678,0 ; 217.678,0 241.681,41.656 ; 217.678,0 241.681,41.656 ; 217.805,55.372 241.681,41.656 ; 217.805,55.372 217.805,111.252 ; 217.805,55.372 241.681,41.656 ; 217.805,55.372 217.805,111.252 ; 217.805,111.252 217.805,121.412 ; 217.805,111.252 217.805,121.412

## Silkscreen, mask and mechanical layers (free items; w line width, h text height)
F.SilkS:
  text "LEFT" at 92.69,120.592 h2.5
  text "rev 1.0" at 105.837,99.077 h1.5 r90
  text "designed by Mattia Dal Ben (https://github.com/mattdibi)" at 82.488,70.551 h1.5 r90
B.SilkS:
  text "RIGHT" at 95.68,120.575 h2.5
  text "designed by Mattia Dal Ben (https://github.com/mattdibi)" at 82.488,91.247 h1.5 r90

## Text inside footprints (layer, text, board x,y; h text height)
TRRS1: F.SilkS "PJ-320A" at 204.135,118.297 h1 r90; B.SilkS "PJ-320A" at 212.135,120.123 h1 r90
U1: F.SilkS "TX0" at 146.105,122.962 h0.8; F.SilkS "D2" at 145.446,120.426 h0.8; F.SilkS "D0" at 145.441,110.262 h0.8; F.SilkS "D1" at 145.475,112.809 h0.8; F.SilkS "GND" at 145.279,115.343 h0.8; F.SilkS "GND" at 145.279,117.883 h0.8; F.SilkS "D4" at 145.442,107.726 h0.8; F.SilkS "C6" at 145.461,105.182 h0.8; F.SilkS "D7" at 145.444,102.645 h0.8; F.SilkS "E6" at 145.46,100.105 h0.8; F.SilkS "B4" at 145.453,97.566 h0.8; F.SilkS "B5" at 145.458,95.025 h0.8; F.SilkS "B6" at 156.375,95.025 h0.8; F.SilkS "B3" at 156.385,100.102 h0.8; F.SilkS "B1" at 156.409,102.649 h0.8; F.SilkS "F4" at 156.395,112.806 h0.8; F.SilkS "VCC" at 156.272,115.343 h0.8; F.SilkS "RST" at 156.297,117.883 h0.8; F.SilkS "GND" at 156.201,120.423 h0.8; F.SilkS "RAW" at 156.175,122.965 h0.8; F.SilkS "F5" at 156.4,110.265 h0.8; F.SilkS "F6" at 156.394,107.725 h0.8; F.SilkS "F7" at 156.397,105.185 h0.8; F.SilkS "B2" at 156.38,97.566 h0.8; B.SilkS "TX0" at 146.63,122.962 h0.8; B.SilkS "B2" at 156.802,97.566 h0.8; B.SilkS "F7" at 156.785,105.185 h0.8; B.SilkS "F6" at 156.788,107.725 h0.8; B.SilkS "F5" at 156.782,110.265 h0.8; B.SilkS "RAW" at 157.007,122.965 h0.8; B.SilkS "GND" at 156.981,120.423 h0.8; B.SilkS "RST" at 156.885,117.883 h0.8; B.SilkS "VCC" at 156.91,115.343 h0.8; B.SilkS "F4" at 156.787,112.806 h0.8; B.SilkS "B1" at 156.773,102.649 h0.8; B.SilkS "B3" at 156.797,100.102 h0.8; B.SilkS "B6" at 156.807,95.025 h0.8; B.SilkS "B5" at 145.88,95.025 h0.8; B.SilkS "B4" at 145.885,97.566 h0.8; B.SilkS "E6" at 145.878,100.105 h0.8; B.SilkS "D7" at 145.894,102.645 h0.8; B.SilkS "C6" at 145.877,105.182 h0.8; B.SilkS "D4" at 145.896,107.726 h0.8; B.SilkS "GND" at 146.059,117.883 h0.8; B.SilkS "GND" at 146.059,115.343 h0.8; B.SilkS "D1" at 145.863,112.809 h0.8; B.SilkS "D0" at 145.897,110.262 h0.8; B.SilkS "D2" at 145.892,120.426 h0.8